# EAGLE board Tardis Lightv006 (EAGLE 6.1)
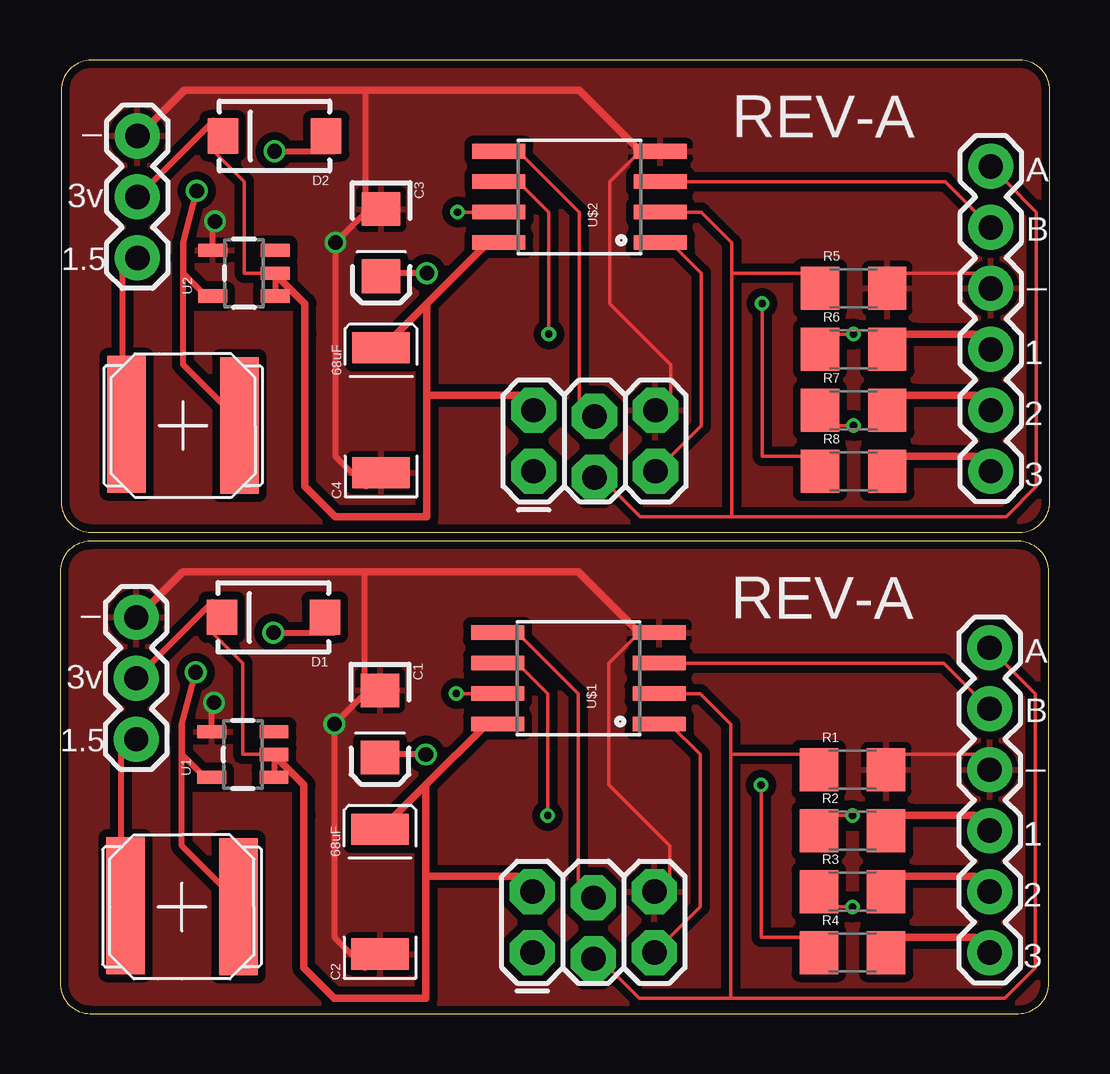
[diagram p0: board, top side]
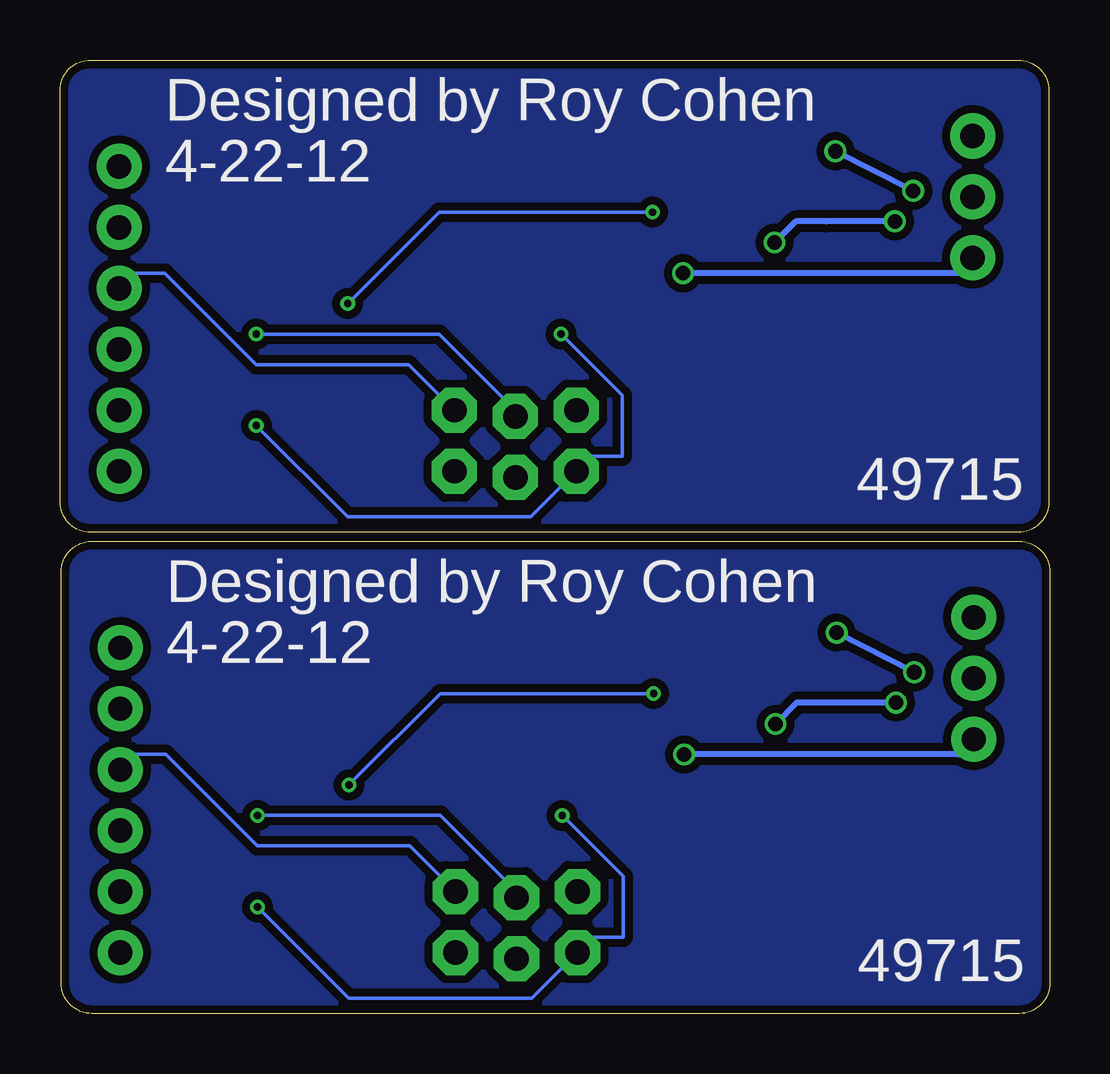
[diagram p1: board, bottom side, seen from below]

Size 41.25 x 39.73 mm. Coordinates in mm from the lower left corner, seen from the top.
Outline: 0,18.41 0,1.27 arc90 1.27,0 39.93,0 arc90 41.2,1.27 41.2,18.41 arc90 39.93,19.68 1.27,19.68 arc90 0,18.41
Outline: 0.05,38.46 0.05,21.33 arc90 1.32,20.06 39.98,20.06 arc90 41.25,21.33 41.25,38.46 arc90 39.98,39.73 1.32,39.73 arc90 0.05,38.46
Copper layers (1*16): Top 0.035mm / dielectric 1.5mm / Bottom 0.035mm
Design rules: minimum track width 6mil, minimum drill 12mil, track to track 6mil, track to pad 6mil, pad to pad 6mil, via to via 6mil, smd to smd 0mil, copper to edge 10mil, drill to drill 10mil, minimum pad ring 10mil, minimum via ring 6mil, stop-mask expansion 2mil, vias tented up to drill 100mil, thermal gap 10mil

## Footprints (pad centres in the part's own frame; a part is rotated, then mirrored left to right if it is on the bottom)
EIA3216 = smd 1.4 x 1.6: A 1.4,0; C -1.4,0
EIA2917 = smd 1.3 x 2.4: A 2.6,0; C -2.6,0
SMA-DIODE = smd 1.27 x 1.47: A -2.15,0; C 2.15,0
2X3_LOCK = drill 1.016 pad 1.88 octagon: 1 0,0; 2 0,2.54; 3 2.54,-0.254; 4 2.54,2.286; 5 5.08,0; 6 5.08,2.54
1X03 = drill 1.016 pad 1.88: 1 0,0; 2 2.54,0; 3 5.08,0
1X06 = drill 1.016 pad 1.88: 1 0,0; 2 2.54,0; 3 5.08,0; 4 7.62,0; 5 10.16,0; 6 12.7,0
NR6028 = smd 5.7 x 1.6: P$1 -0.05,-2.35; P$2 0,2.35
1206 = smd 1.6 x 1.8: 1 -1.4,0; 2 1.4,0
SOT23-5 = smd 0.55 x 1.2: 1 -0.95,-1.3; 2 0,-1.3; 3 0.95,-1.3; 4 0.95,1.3; 5 -0.95,1.3
SO08-EIAJ = smd 0.61 x 2.21: 1 -1.905,-3.378; 2 -0.635,-3.378; 3 0.635,-3.378; 4 1.905,-3.378; 5 1.905,3.353; 6 0.635,3.353; 7 -0.635,3.353; 8 -1.905,3.353

## Placement (x,y rotation side)
C1  10uF  [EIA3216]  13.33,12.06 270 top
C2  68uF  [EIA2917]  13.33,5.08 90 top
C3  10uF  [EIA3216]  13.38,32.12 270 top
C4  68uF  [EIA2917]  13.38,25.14 90 top
D1  MBRA140  [SMA-DIODE]  8.89,16.51 180 top
D2  MBRA140  [SMA-DIODE]  8.94,36.57 180 top
J1  AVR_SPI_PRG_62X3_LOCK  [2X3_LOCK]  19.68,2.54 0 top
J2  AVR_SPI_PRG_62X3_LOCK  [2X3_LOCK]  19.73,22.6 0 top
JP1  [1X03]  3.17,16.51 270 top
JP2  [1X03]  3.22,36.57 270 top
JP3  [1X06]  38.74,15.24 270 top
JP4  [1X06]  38.78,35.3 270 top
L1  47 uH  [NR6028]  5.08,4.45 270 top
L2  47 uH  [NR6028]  5.13,24.5 270 top
R1  [1206]  33.02,10.16 0 top
R2  [1206]  33.02,7.62 0 top
R3  [1206]  33.02,5.08 0 top
R4  [1206]  33.02,2.54 0 top
R5  [1206]  33.07,30.22 0 top
R6  [1206]  33.07,27.68 0 top
R7  [1206]  33.07,25.14 0 top
R8  [1206]  33.07,22.6 0 top
U1  NCP1402  [SOT23-5]  7.62,10.79 90 top
U2  NCP1402  [SOT23-5]  7.67,30.85 90 top
U$1  ATTINY45  [SO08-EIAJ]  21.59,13.97 90 top
U$2  ATTINY45  [SO08-EIAJ]  21.64,34.03 90 top

## Library data of the parts
C1-C4 D1 D2 J1 J2 JP1-JP4 R1-R8 U1 U2 U$1 U$2 = SparkFun
L1 L2 = ieee-ucsd-lbr_inductor-bourns Roy Edit

## Nets
A_PIN1: J2.3 JP4.1 R5.1 U$2.2
A_PIN2: JP4.2 U$2.3
A_PIN3: J1.3 JP3.1 R1.1 U$1.2
A_PIN4: JP3.2 U$1.3
GND: C1.C C2.C J1.6 JP1.1 JP3.3 R1.2 U1.4 U$1.4
GND1: C3.C C4.C J2.6 JP2.1 JP4.3 R5.2 U2.4 U$2.4
N$1: JP3.4 R2.2
N$2: D2.A L2.P$2 U2.5
N$3: D1.A L1.P$2 U1.5
N$5: JP4.4 R6.2
N$6: JP3.5 R3.2
N$7: JP3.6 R4.2
N$8: JP4.5 R7.2
N$9: JP4.6 R8.2
PIN0: J1.4 R2.1 U$1.5
PIN1: J1.1 R3.1 U$1.6
PIN2: R4.1 U$1.7
PIN3: J2.4 R6.1 U$2.5
PIN4: J2.1 R7.1 U$2.6
PIN5: R8.1 U$2.7
RST: J1.5 U$1.1
RST1: J2.5 U$2.1
VIN: C1.A JP1.3 L1.P$1
VIN1: C3.A JP2.3 L2.P$1
VOUT: C2.A D1.C J1.2 JP1.2 U1.1 U1.2 U$1.8
VOUT1: C4.A D2.C J2.2 JP2.2 U2.1 U2.2 U$2.8

## Tracks (layer width: path | path; a pad name or v marks a point on that pad's centre or on a via)
A_PIN1
  Top 0.152: 27.99,30.85 31.8,30.85 R5.1 | 27.99,30.85 27.99,32.12 26.72,33.39 25.45,33.39 U$2.2 | 27.99,20.69 24.18,20.69 22.91,21.96 J2.3 | 27.99,30.85 27.99,20.69 | 27.99,20.69 39.42,20.69 40.69,21.96 40.69,33.39 39.42,34.66 JP4.1
A_PIN2
  Top 0.152: U$2.3 25.45,34.66 36.88,34.66 38.15,33.39 JP4.2
A_PIN3
  Top 0.152: 27.94,10.79 31.75,10.79 R1.1 | 27.94,10.79 27.94,12.06 26.67,13.33 25.4,13.33 U$1.2 | 27.94,0.64 24.13,0.64 22.86,1.91 J1.3 | 27.94,10.79 27.94,0.64 | 27.94,0.64 39.37,0.64 40.64,1.91 40.64,13.33 39.37,14.61 JP3.1
A_PIN4
  Top 0.152: U$1.3 25.4,14.61 36.83,14.61 38.1,13.33 JP3.2
GND  (via drill 0.6 pad 0.25)
  Top 0.152: 24.13,15.88 21.59,18.42 12.7,18.42 | 24.13,15.88 U$1.4 24.13,15.88 | R1.2 34.29,10.79 38.1,10.79 JP3.3 | 24.13,15.88 22.86,14.61 22.86,9.53 25.4,6.98 25.4,5.71 J1.6
  Top 0.254: 12.7,13.33 C1.C 12.7,13.33 | C2.C 12.7,1.91 11.43,3.17 v11.43,12.06 12.7,13.33 | 5.08,18.42 3.81,17.15 | 12.7,18.42 5.08,18.42 | 12.7,13.33 12.7,18.42 | 3.81,17.15 JP1.1 | v6.41,12.95 6.32,12.86 U1.4 | 12.7,18.42 5.08,18.42 | 5.08,18.42 3.81,17.15
  Top 0.305: 24.13,15.88 21.59,18.42 12.7,18.42 5.14,18.42 3.24,16.51
  Bottom 0.152: J1.6 25.4,5.71 26.67,6.98 33.02,6.98 36.83,10.79 38.1,10.79 JP3.3
  Bottom 0.254: v6.41,12.95 9.27,12.95 10.54,12.95 v11.43,12.06
  pour Top (isolate 0.33): 1.45,19.48 39.85,19.48 arc-90 40.92,18.42 40.92,1.17 arc-90 40.03,0.28 1.45,0.28 arc-90 0.2,1.52 0.2,18.24 arc-90
GND1  (via drill 0.6 pad 0.25)
  Top 0.152: 24.18,35.93 21.64,38.47 12.75,38.47 | 24.18,35.93 U$2.4 24.18,35.93 | R5.2 34.34,30.85 38.15,30.85 JP4.3 | 24.18,35.93 22.91,34.66 22.91,29.58 25.45,27.04 25.45,25.77 J2.6
  Top 0.254: 12.75,33.39 C3.C 12.75,33.39 | C4.C 12.75,21.96 11.48,23.23 v11.48,32.12 12.75,33.39 | 5.13,38.47 3.86,37.2 | 12.75,38.47 5.13,38.47 | 12.75,33.39 12.75,38.47 | 3.86,37.2 JP2.1 | v6.46,33.01 6.37,32.92 U2.4 | 12.75,38.47 5.13,38.47 | 5.13,38.47 3.86,37.2
  Top 0.305: 24.18,35.93 21.64,38.47 12.75,38.47 5.19,38.47 3.29,36.57
  Bottom 0.152: J2.6 25.45,25.77 26.72,27.04 33.07,27.04 36.88,30.85 38.15,30.85 JP4.3
  Bottom 0.254: v6.46,33.01 9.32,33.01 10.59,33.01 v11.48,32.12
  pour Top (isolate 0.33): 1.49,39.54 39.9,39.54 arc-90 40.97,38.47 40.97,21.23 arc-90 40.08,20.34 1.49,20.34 arc-90 0.25,21.58 0.25,38.29 arc-90
N$1
  Top 0.254: R2.2 34.29,8.26 35.56,8.26 38.1,8.26 JP3.4
  Top 0.305: JP3.4 38.1,8.26 35.56,8.26 34.93,8.26 34.86,8.19
N$2  (via drill 0.61)
  Top 0.254: v8.94,35.93 11.48,35.93 D2.A | 5.13,32.12 v5.7,34.28 | 5.13,30.85 5.13,27.04 7.67,24.5 L2.P$2 | 5.13,30.85 5.13,32.12 | 5.13,32.12 5.13,30.85 | 5.13,30.85 5.76,30.22 | 5.13,32.12 5.13,30.85 | 5.13,30.85 6.02,29.96 6.08,29.9 U2.5
  Bottom 0.254: v5.7,34.28 v8.94,35.93
N$3  (via drill 0.61)
  Top 0.254: v8.89,15.88 11.43,15.88 D1.A | 5.08,12.06 v5.65,14.22 | 5.08,10.79 5.08,6.98 7.62,4.45 L1.P$2 | 5.08,10.79 5.08,12.06 | 5.08,12.06 5.08,10.79 | 5.08,10.79 5.71,10.16 | 5.08,12.06 5.08,10.79 | 5.08,10.79 5.97,9.91 6.03,9.85 U1.5
  Bottom 0.254: v5.65,14.22 v8.89,15.88
N$4
  pour Bottom (isolate 0.33): 1.45,19.48 39.85,19.48 arc-90 40.92,18.42 40.92,1.17 arc-90 40.03,0.28 1.45,0.28 arc-90 0.2,1.52 0.2,18.24 arc-90
N$5
  Top 0.254: R6.2 34.34,28.31 35.61,28.31 38.15,28.31 JP4.4
  Top 0.305: JP4.4 38.15,28.31 35.61,28.31 34.97,28.31 34.91,28.25
N$6
  Top 0.254: R3.2 34.29,5.71 35.05,5.71 35.56,5.71 38.1,5.71 JP3.5
  Top 0.305: 35.56,5.71 35.05,5.71 38.1,5.71 38.8,5.02
N$7
  Top 0.254: R4.2 34.29,3.17 35.12,3.17 35.56,3.17 38.1,3.17 JP3.6
  Top 0.305: 38.8,2.48 38.1,3.17 35.56,3.17 35.12,3.17
N$8
  Top 0.254: R7.2 34.34,25.77 35.1,25.77 35.61,25.77 38.15,25.77 JP4.5
  Top 0.305: 35.61,25.77 35.1,25.77 38.15,25.77 38.85,25.07
N$9
  Top 0.254: R8.2 34.34,23.23 35.16,23.23 35.61,23.23 38.15,23.23 JP4.6
  Top 0.305: 38.85,22.53 38.15,23.23 35.61,23.23 35.16,23.23
N$10
  pour Bottom (isolate 0.33): 1.49,39.54 39.9,39.54 arc-90 40.97,38.47 40.97,21.23 arc-90 40.08,20.34 1.49,20.34 arc-90 0.25,21.58 0.25,38.29 arc-90
PIN0  (via drill 0.3)
  Top 0.152: v33.02,8.26 31.75,8.26 R2.1 | U$1.5 19.05,15.88 21.59,13.33 21.59,4.45 J1.4
  Bottom 0.152: v33.02,8.26 25.4,8.26 21.59,4.45 J1.4
PIN1  (via drill 0.3)
  Top 0.152: v33.02,4.45 31.75,4.45 R3.1 | v20.32,8.26 20.32,13.33 19.05,14.61 U$1.6
  Bottom 0.152: v33.02,4.45 29.21,0.64 21.59,0.64 20.32,1.91 J1.1 19.05,3.17 17.78,3.17 17.78,5.71 v20.32,8.26
PIN2  (via drill 0.3)
  Top 0.152: v29.21,9.53 29.21,3.17 31.75,3.17 R4.1 | v16.51,13.33 17.78,13.33 U$1.7
  Bottom 0.152: v29.21,9.53 25.4,13.33 v16.51,13.33
PIN3  (via drill 0.3)
  Top 0.152: v33.07,28.31 31.8,28.31 R6.1 | U$2.5 19.1,35.93 21.64,33.39 21.64,24.5 J2.4
  Bottom 0.152: v33.07,28.31 25.45,28.31 21.64,24.5 J2.4
PIN4  (via drill 0.3)
  Top 0.152: v33.07,24.5 31.8,24.5 R7.1 | v20.37,28.31 20.37,33.39 19.1,34.66 U$2.6
  Bottom 0.152: v33.07,24.5 29.26,20.69 21.64,20.69 20.37,21.96 J2.1 19.1,23.23 17.83,23.23 17.83,25.77 v20.37,28.31
PIN5  (via drill 0.3)
  Top 0.152: v29.26,29.58 29.26,23.23 31.8,23.23 R8.1 | v16.56,33.39 17.83,33.39 U$2.7
  Bottom 0.152: v29.26,29.58 25.45,33.39 v16.56,33.39
RST
  Top 0.152: U$1.1 25.4,12.06 26.67,10.79 26.67,4.45 25.4,3.17 J1.5
RST1
  Top 0.152: U$2.1 25.45,32.12 26.72,30.85 26.72,24.5 25.45,23.23 J2.5
VIN  (via drill 0.61)
  Top 0.254: v15.24,10.79 13.97,10.79 C1.A | L1.P$1 2.54,5.71 2.54,10.79 JP1.3
  Bottom 0.254: v15.24,10.79 3.81,10.79 JP1.3
VIN1  (via drill 0.61)
  Top 0.254: v15.29,30.85 14.02,30.85 C3.A | L2.P$1 2.59,25.77 2.59,30.85 JP2.3
  Bottom 0.254: v15.29,30.85 3.86,30.85 JP2.3
VOUT
  Top 0.152: 8.89,10.79 7.62,10.79 7.62,14.61 6.35,15.88 D1.C | 8.89,10.79 U1.2 8.89,10.79 | 15.24,9.53 13.97,8.26 C2.A | 15.24,9.53 17.78,12.06 U$1.8 | 10.16,1.91 10.16,8.26 | 12.7,0.64 15.24,0.64 15.24,5.71 | 15.24,9.53 15.24,5.71 | 15.24,5.71 19.05,5.71 J1.2
  Top 0.254: JP1.2 3.81,14.61 6.35,17.15 D1.C | U1.2 U1.1
  Top 0.305: 17.78,12.06 15.24,9.53 | 15.24,9.53 13.97,8.26 | 15.24,9.53 15.24,5.71 | 15.24,5.71 15.24,0.64 12.7,0.64 11.43,0.64 10.16,1.91 10.16,8.26 10.16,9.53 8.89,10.79 | 15.24,5.71 19.05,5.71 J1.2
VOUT1
  Top 0.152: 8.94,30.85 7.67,30.85 7.67,34.66 6.4,35.93 D2.C | 8.94,30.85 U2.2 8.94,30.85 | 15.29,29.58 14.02,28.31 C4.A | 15.29,29.58 17.83,32.12 U$2.8 | 10.21,21.96 10.21,28.31 | 12.75,20.69 15.29,20.69 15.29,25.77 | 15.29,29.58 15.29,25.77 | 15.29,25.77 19.1,25.77 J2.2
  Top 0.254: JP2.2 3.86,34.66 6.4,37.2 D2.C | U2.2 U2.1
  Top 0.305: 17.83,32.12 15.29,29.58 | 15.29,29.58 14.02,28.31 | 15.29,29.58 15.29,25.77 | 15.29,25.77 15.29,20.69 12.75,20.69 11.48,20.69 10.21,21.96 10.21,28.31 10.21,29.58 8.94,30.85 | 15.29,25.77 19.1,25.77 J2.2

## Text on the board
_tsilk: _ | REV-A | A | 3v | B | 1.5 | _ | 1 | 2 | 3 | _ | REV-A | A | 3v | B | 1.5 | _ | 1 | 2 | 3
_bsilk: Designed by Roy Cohen | 4-22-12 | 49715 | Designed by Roy Cohen | 4-22-12 | 49715